# Altium PCB FlightEstimator.PcbDoc (part 2 of 2)
Units mm, origin at the board's own origin, x right, y up, seen from the top; angles counter-clockwise.
Board outline 49.66 x 49.66 mm, 6 copper layers (Top Layer, GND1, Middle, GND2, GND3, Bottom Layer), stack 1.959 mm thick; 78 components, 52 nets, 392 pads, 336 vias.
Unrouted connection lines stored in the file: 154.
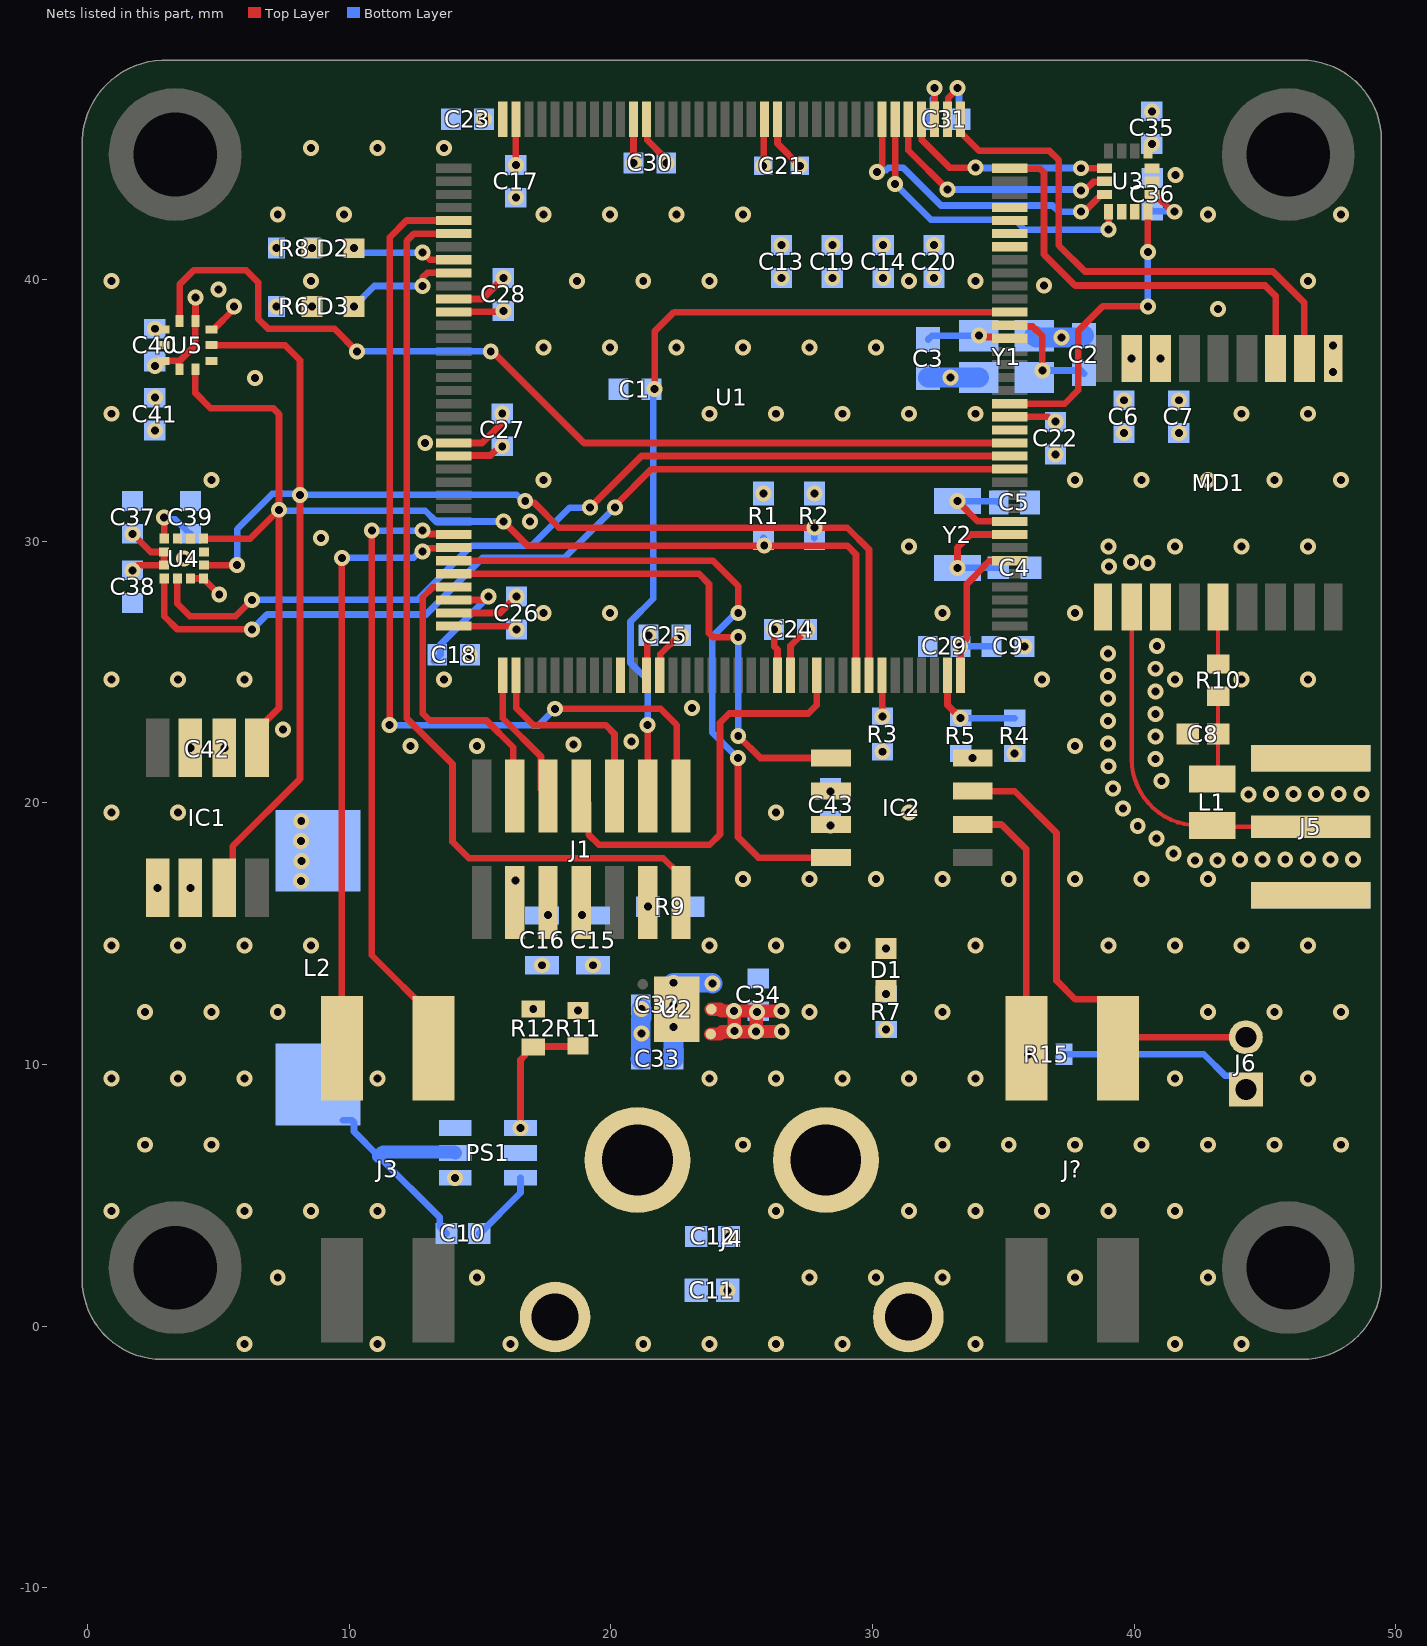
[diagram p6: the nets of this part, all layers, seen from the top]

## Part data (continued)
R15: library part CMP-03412-039700-1, "Anti-Sulfurated Chip Resistors Automotive Grade 120Ω 1% 100ppm/°C 0603 AF0603FR-07120RL", Case/Package=0603, Max Operating Temperature=155°C, Max Power Dissipation=100mW, Min Operating Temperature=-55°C, Resistance=120R, Resistor Type="Thick Film", Temperature Coefficient=100ppm/°C, Tolerance=1%, Features="Moisture Resistant", Height=0.022inch, Length=0.063inch, Number of Terminations=2, Packaging="Tape and Reel", RoHS Compliant=Yes, Series=AF, Width=0.031inch
U1: library part CMP-12105-000009-1, "LQFP 144 20X20X1.4 2", Ambient Temperature Range High=+85°C, Ambient Temperature Range Low=-40°C, Frequency=480MHz, Manufacturer=STMicroelectronics, Max Junction Temp=+125°C, Max Supply Voltage=3.6V, Min Supply Voltage=1.62V, Package=LQFP144-1A, Temperature="-40°C to +125°C", Automotive=No, Category=IC, ComponentLink2Description=Datasheet, ComponentLink2URL=https://www.st.com/resource/en/datasheet/stm32h753zi.pdf, Core Architecture="ARM Cortex-M7", Data Bus Width=32bits, Device Class L1="Integrated Circuits (ICs)", Device Class L2="Embedded Processors and Controllers", Device Class L3=Microcontrollers, Digikey Description="LQFP 144 20X20X1.4 2", Height=1.6mm, Interface=I2C,SPI,UART,USART,CAN,USB,LIN,IrDA,Ethernet,I2S,SMBus,Other, Lead Free=Yes, Manufacturer Part Number=STM32H753ZIT6, Memory Size=2MBytes, Memory Type=FLASH, Mouser Description="MCU 32-Bit STM32 ARM Cortex M7 RISC 2MB Flash 1.8V/2.5V/3.3V 144-Pin LQFP Tray", Number Of A/D Converters=3, Number Of Adc Channels=36, Number Of Cores=1, Number Of Ethernet Channels=1, Number Of I2C Channels=4, Number Of I/Os=114, Number Of Pwm Channels=24, Number Of Spi Channels=6, Number Of Timers/Counters=20, Number Of Uart Channels=9, Number Of Usb Channels=2, Octopart=https://octopart.com/stm32h753zit6-stmicroelectronics-87879771, Ram Size=1MBytes, RoHS=TRUE, Standoff Height=0.05mm, Temperature Range High=+125°C, Temperature Range Low=-40°C
U2: library part CMP-12153-000011-1, "IC REG LINEAR 3.3V 2A 6DFN", Case/Package=DFN, Dropout Voltage=130mV, Max Input Voltage=6V, Max Operating Temperature=125°C, Min Input Voltage=1.25V, Min Operating Temperature=-40°C, Operating Supply Current=1mA, Output Current=2A, Output Voltage=3.3V, Package Quantity=3000, Lead Free="Lead Free", Mount="Surface Mount", Number of Outputs=1, Number of Regulators=1, Output Type=Fixed, Packaging="Tape and Reel"
U3: library part CMP-12177-000015-1, "INEMO INERTIAL MODULE: 3D ACCELE"
U4: library part CMP-2000-07463-2, "SENSOR MR I2C/SPI 12LGA", Manufacturer=STMicroelectronics, Manufacturer Part Number=LIS3MDLTR, Max Supply Voltage=3.6V, Min Supply Voltage=1.71V, Operating Supply Current=40-270uA, Package=VFLGA-12-8365767, Temperature="-40°C to +85°C", Temperature Range High=+85°C, Temperature Range Low=-40°C, Automotive=No, Category=IC, ComponentLink2Description=Datasheet, ComponentLink2URL=https://www.st.com/resource/en/datasheet/lis3mdl.pdf, Device Class L1=Sensors, Device Class L2="Magnetic Sensors", Device Class L3=unset, Digikey Description="SENSOR MR I2C/SPI 12LGA", Footprint Url=https://www.st.com/content/ccc/resource/technical/document/technical_note/73/17/9c/16/dd/96/4a/01/CD00134799.pdf/files/CD00134799.pdf/jcr:content/translations/en.CD00134799.pdf, Height=1mm, Lead Free=Yes, Mouser Description="Board Mount Hall Effect / Magnetic Sensors Ultra Lo-Pwr Hi Perf 3-Axis 1.9-3.6V", Octopart=https://octopart.com/lis3mdltr-stmicroelectronics-29403125, RoHS=TRUE, Sensing Method=Magnetic, Sensor Output=I2C,SPI
U5: library part CMP-2000-06573-1, "MEMS Pressure Sensor: 260 - 1260 hPa Absolute Digital Output Barometer, 1.7 to 3.6 V, -30 to 105 degC, 10-Pin LGA, RoHS, Tape and Reel", Manufacturer=STMicroelectronics, Operating Pressure=3.77PSI~18.27PSI(26kPa~126kPa), Operating Temperature=-30°C~105°C, Package / Case=10-VFLGA, Package Description="10-Pin Holed Land Grid Array, Body 2.5 x 2.5 mm, Pitch 0.6 mm", Package Reference=LGA-10, PartNumber=LPS25HB, Supplier Device Package=10-LLGA(2.5x2.5), Voltage - Supply=1.7V~3.6V, Accuracy=±0.003PSI(±0.02kPa), Category=Sensors,Transducers, Datasheet URL=http://www.st.com/st-web-ui/static/active/en/resource/technical/document/datasheet/DM00141379.pdf, Datasheet Version="Rev. 2, 05/2015", Family=PressureSensors,Transducers, Features=TemperatureCompensated, Manufacturer URL=http://www.st.com/, Maximum Pressure=290.08PSI(2000kPa), Mounting Technology=SurfaceMount, Output=24b, Output Type=I²C,SPI, Package URL=http://www.st.com/st-web-ui/static/active/en/resource/technical/document/datasheet/DM00141379.pdf, Port Size=-, Port Style=NoPort, Pressure Type=Absolute, Series=-, Termination Style=SolderPad
Y1: "Crystal or Oscillator", Manufacturer_Name="Diodes Incorporated", Mouser Part Number=729-FL0800008Q, Datasheet Link=https://www.mouser.com/datasheet/2/115/L0800008Q-1536355.pdf, Height=0.78mm, Manufacturer_Part_Number=FL0800008Q, Mouser Price/Stock=https://www.mouser.co.uk/ProductDetail/Diodes-Incorporated/FL0800008Q?qs=gZXFycFWdAO7SZw%2FmZY3pg%3D%3D
Y2: library part CMP-27762-015953-1, "Crystal 32.768kHz ±20ppm (Tol) 6pF FUND 70kΩ Automotive 2-Pin Mini-CSMD T/R", Case/Package=SMD/SMT, ESR (Equivalent Series Resistance)=70kR, Frequency=32.768kHz, Frequency Tolerance=20ppm, Load Capacitance=6pF, Max Operating Temperature=85°C, Min Operating Temperature=-40°C, Ratings=AEC-Q200, Height=0.035inch, Length=0.126inch, Mount="Surface Mount", Packaging="Cut Tape", RoHS Compliant=Yes, Series=ABS07AIG, Width=0.059inch

## Free pads (board coordinates)
  round 5.08 hole 3.2: 2(3.343,2.237) 2(3.343,44.782) 2(45.888,2.237) 2(45.888,44.782)

## Via types
v1: diameter 0.61, hole 0.305, Top Layer to Bottom Layer, tented both sides, 336 vias

## Nets (pads, with @x,y where several pads share a name; then routed paths per layer and width w, separated by ;. In a path a pad name is that pad's centre, name@x,y a point inside that pad or via, vN(x,y) a via of type N, cw(c..) or ccw(c..) an arc to the next point about the centre after c; other vN are vias at no path point)
3V3: C6.2 C7.2 C9.1 C13.1 C14.1 C19.1 C20.1 C21.2 C22.1 C23.1 C24.1 C25.1 C26.1 C27.1 C28.1 C29.1 C30.1 C31.1 C34.1 C35.1 C36.1 C37.1 C38.1 C40.2 C41.2 C42.1 C43.1 D1.2 IC1.3 IC1.5 IC1.6 IC2.3 J1.3 MD1.7 MD1.8 R1.1 R2.1 R4.1 U1.6 U1.17 U1.30 U1.32 U1.33 U1.39 U1.52 U1.62 U1.72 U1.84 U1.95 U1.108 U1.121 U1.131 U1.144 U2.1 U2.2 U3.5 U3.8 U4.5 U4.6 U4.9 U4.10 U5.1 U5.5 U5.6 U5.10 | length 43.5
  Top Layer w0.254: v1(1.714,28.889) 1.913,29.088 U4.6@2.916,29.088 U4.5@2.916,29.587 2.413,29.587 v1(1.714,30.286) ; U5.10@2.895,36.896 3.515,36.896 4.115,37.496 U5.6@4.115,38.416 4.12,38.421 4.12,39.314 v1(4.124,39.319) ; U4.9@3.929,28.575 4.417,28.575 v1(5.029,27.962) v1@5.054,27.962 ; U5.5@4.735,38.096 4.81,38.096 5.601,38.887 v1(5.601,38.965) ; U1.108@13.99,26.758 16.162,26.758 16.325,26.596 v1@16.421,26.596 ; U1.95@13.99,33.258 14.011,33.278 15.397,33.278 15.749,33.631 v1(15.846,33.631) ; U1.84@13.99,38.758 14.011,38.778 15.859,38.778 v1(15.888,38.807) ; v1(20.861,44.463) 20.863,44.465 20.863,46.131 U1.62@20.865,46.133 ; U1.121@21.865,24.883 21.886,24.903 21.886,25.684 22.605,26.403 v1(22.687,26.403) ; v1(24.709,12.054) v1@24.715,12.048 ; v1@24.715,11.291 v1(24.721,11.285) ; v1(25.818,44.348) 25.845,44.376 25.845,46.113 U1.52@25.865,46.133 ; U1.131@26.865,24.883 26.865,26.005 v1(27.492,26.632) ; U1.39@32.365,46.133 v1(32.365,47.32) ; U1.144@33.365,24.883 33.365,26.05 33.604,26.289 33.604,28.369 34.261,29.026 34.261,29.059 34.439,29.238 35.22,29.238 U1.6@35.24,29.258 ; U1.17@35.24,34.758 36.706,34.758 36.893,34.571 v1(36.99,34.571) ; U3.8@40.523,44.92 40.523,45.027 v1(40.68,45.185) ; U3.5@40.685,43.258 40.798,43.258 41.46,42.595 v1@41.573,42.595
  Top Layer w0.508: U2.1@23.817,11.166 24.167,11.166 24.25,11.249 v1@25.543,11.249 ; U2.2@23.839,12.116 24.167,12.116 24.233,12.05 v1@25.559,12.05 ; v1@24.715,11.291 v1@24.715,12.048 ; v1@26.522,11.271 v1(26.528,11.265) v1(25.543,11.265) 25.559,11.281 25.559,11.991 v1(25.576,12.007) 25.603,12.007 25.646,12.05 v1(26.516,12.05) v1@26.522,12.044
  Bottom Layer w0.254: C31.1@32.111,46.133 32.302,46.324 32.302,46.92 32.365,46.983 v1(32.365,47.32) ; v1(33.35,25.981) C9.1@34.55,25.981 ; C36.1@40.685,42.631 40.703,42.613 41.517,42.613 v1(41.535,42.595)
  other v1: 30.518,14.43 2.672,16.756 3.922,16.756 16.345,17.031 28.393,19.138 35.433,21.885 3.922,22.106 16.386,26.631 25.832,31.825 27.775,31.825 39.605,35.39 41.705,35.39 2.565,35.488 2.565,36.696 39.905,36.983 41.005,36.983 26.518,41.318 28.461,41.318 30.404,41.318 32.348,41.318 15.142,46.133
24V0: C11.1 C12.1 J4.2 PS1.3 PS1.5
BOOT0: R3.2 U1.138 | length 1.6
  Top Layer w0.254: U1.138@30.365,24.883 30.374,24.874 30.374,23.317 v1(30.383,23.308)
CANH: IC2.7 J6.2 J?.4 | length 18.4
  Top Layer w0.254: IC2.7@33.827,20.447 35.433,20.447 37.029,18.851 37.029,13.208 37.742,12.494 38.706,12.494 39.379,11.821 J?.4@39.379,10.621 39.8,11.042 J6.2@44.006,11.042
CANL: IC2.6 J?.2 R15.2 | length 10
  Top Layer w0.254: IC2.6@33.827,19.177 34.924,19.177 35.879,18.223 J?.2@35.879,10.621
  other v1: 35.964,10.392
DCREG5V0: C15.1 C16.1 C32.1 C33.1 L2.2 R11.2 U2.5 U2.6 | length 1.9
  Bottom Layer w0.762: C33.1@21.137,10.214 21.139,10.216 21.139,11.763 21.16,11.784 v1(21.16,12.12)
  other v1: 21.16,11.184 18.745,12.068 17.367,13.795 19.317,13.795 8.158,17.013 8.166,17.785 8.158,18.543 8.163,19.317
FDCAN1_RX: IC2.4 U1.103 | length 25.6
  Top Layer w0.254: U1.103@13.99,29.258 13.993,29.261 23.889,29.261 24.865,28.284 v1(24.865,27.253) ; v1(24.857,21.708) 24.857,18.691 25.641,17.907 IC2.4@28.403,17.907
  Bottom Layer w0.254: v1(24.857,21.708) 23.865,22.7 23.865,26.335 24.784,27.253 v1(24.865,27.253)
FDCAN1_TX: IC2.1 U1.104 | length 20.6
  Top Layer w0.254: U1.104@13.99,28.758 21.26,28.758 23.363,28.758 23.748,28.372 23.748,26.485 23.898,26.335 v1(24.865,26.335) ; v1(24.865,22.562) 25.71,21.717 IC2.1@28.403,21.717
  Bottom Layer w0.254: v1(24.865,22.562) v1(24.865,26.335)
GND: C1.2 C2.2 C3.2 C4.2 C5.2 C6.1 C7.1 C8.2 C9.2 C11.2 C12.2 C13.2 C14.2 C15.2 C16.2 C17.2 C18.2 C19.2 C20.2 C21.1 C22.2 C23.2 C24.2 C25.2 C26.2 C27.2 C28.2 C29.2 C30.2 C31.2 C32.2 C33.2 C34.2 C35.2 C36.2 C37.2 C38.2 C39.1 C40.1 C41.1 C42.2 C43.2 IC1.2 IC2.2 IC2.8 J1.5 J1.7 J4.1 J4.3 J4.4 J5.2 J5.3 J5.4 J5.5 MD1.1 MD1.10 MD1.12 PS1.1 R3.1 R5.1 R6.1 R7.1 R8.1 R9.1 R12.1 U1.16 U1.31 U1.38 U1.51 U1.61 U1.83 U1.94 U1.107 U1.120 U1.130 U2.3 U2.7 U3.2 U3.3 U3.6 U3.7 U4.2 U4.3 U4.12 U5.3 U5.8 U5.9 Y1.2 Y1.4 | length 23.9
  Top Layer w0.254: U1.107@13.99,27.258 15.759,27.258 v1@16.442,27.941 ; U1.94@13.99,33.758 15.071,33.758 15.888,34.574 ; U1.83@13.99,39.258 15.085,39.258 v1(15.888,40.06) ; U1.120@21.365,24.883 21.386,24.903 21.386,26.356 v1(21.433,26.403) ; U1.61@21.365,46.133 21.386,46.113 21.386,45.332 22.047,44.67 22.047,44.531 v1(22.115,44.463) ; v1(26.238,26.632) 26.238,25.985 26.365,25.858 U1.130@26.365,24.883 ; U1.51@26.365,46.133 26.365,45.201 v1(27.218,44.348) ; U1.38@32.865,46.133 32.886,46.153 32.886,46.934 33.238,47.287 v1(33.238,47.32)
  Bottom Layer w0.254: v1(33.238,47.32) 33.302,47.257 33.302,46.196 C31.2@33.365,46.133
  Bottom Layer w0.762: C33.2@22.391,10.214 v1(22.391,11.426) ; v1(22.391,13.126) 23.855,13.126 v1(23.887,13.095) ; C3.2@32.121,36.258 Y1.4@34.061,36.258 ; Y1.2@36.181,37.858 36.257,37.783 38.005,37.783 38.005,37.785 C2.2@38.08,37.86
  other v1: 5.994,-0.686 11.074,-0.686 16.154,-0.686 21.234,-0.686 23.774,-0.686 26.314,-0.686 28.854,-0.686 33.934,-0.686 41.554,-0.686 44.094,-0.686 24.46,1.372 7.264,1.854 14.884,1.854 27.584,1.854 30.124,1.854 32.664,1.854 37.744,1.854 42.824,1.854 24.51,3.429 0.914,4.394 5.994,4.394 8.534,4.394 11.074,4.394 26.314,4.394 31.394,4.394 33.934,4.394 36.474,4.394 39.014,4.394 41.554,4.394 14.045,5.671 2.184,6.934 4.724,6.934 25.044,6.934 32.664,6.934 35.204,6.934 37.744,6.934 40.284,6.934 42.824,6.934 45.364,6.934 47.904,6.934 0.914,9.474 3.454,9.474 5.994,9.474 11.074,9.474 23.774,9.474 26.314,9.474 28.854,9.474 31.394,9.474 33.934,9.474 41.554,9.474 46.634,9.474 30.518,11.343 2.184,12.014 4.724,12.014 7.264,12.014 27.584,12.014 32.664,12.014 42.824,12.014 45.364,12.014 47.904,12.014 17.031,12.116 22.391,12.276 0.914,14.554 3.454,14.554 5.994,14.554 8.534,14.554 23.774,14.554 26.314,14.554 28.854,14.554 33.934,14.554 39.014,14.554 41.554,14.554 44.094,14.554 46.634,14.554 17.593,15.718 18.897,15.711 25.044,17.094 27.584,17.094 30.124,17.094 32.664,17.094 35.204,17.094 37.744,17.094 40.284,17.094 42.824,17.094 42.319,17.807 43.182,17.807 44.046,17.831 44.909,17.843 45.773,17.843 46.636,17.843 47.5,17.843 48.364,17.843 41.494,18.064 40.845,18.634 40.135,19.125 0.914,19.634 3.454,19.634 26.314,19.634 31.394,19.634 39.571,19.779 44.363,20.319 45.226,20.333 46.09,20.333 46.954,20.333 47.817,20.333 48.681,20.333 28.393,20.438 39.193,20.555 41.044,20.842 39.018,21.401 40.809,21.674 33.827,21.717 30.383,21.955 5.222,22.106 12.344,22.174 14.884,22.174 37.744,22.174 18.565,22.241 39.001,22.264 20.777,22.343 40.81,22.537 7.457,22.799 39.001,23.128 40.81,23.401 23.096,23.631 39.001,23.992 40.81,24.264 0.914,24.714 3.454,24.714 5.994,24.714 13.614,24.714 36.474,24.714 41.554,24.714 44.094,24.714 46.634,24.714 39.001,24.855 40.81,25.128 14.617,25.66 39.001,25.719 35.804,25.981 40.868,25.99 17.424,27.254 19.964,27.254 32.664,27.254 37.744,27.254 16.386,27.885 39.032,29.044 40.518,29.174 39.881,29.202 3.679,29.338 31.394,29.794 39.014,29.794 41.554,29.794 44.094,29.794 46.634,29.794 8.915,30.13 16.909,30.758 4.724,32.334 17.424,32.334 37.744,32.334 40.284,32.334 42.824,32.334 45.364,32.334 47.904,32.334 36.99,33.317 12.902,33.758 39.605,34.136 41.705,34.136 2.565,34.235 0.914,34.874 15.846,34.885 23.774,34.874 26.314,34.874 28.854,34.874 31.394,34.874 33.934,34.874 44.094,34.874 46.634,34.874 6.401,36.246 32.977,36.258 47.605,36.462 17.424,37.414 19.964,37.414 22.504,37.414 25.044,37.414 27.584,37.414 30.124,37.414 47.605,37.49 37.224,37.783 2.565,38.123 43.205,38.88 7.221,38.976 4.994,39.627 36.551,39.776 0.914,39.954 8.534,39.954 18.694,39.954 21.234,39.954 23.774,39.954 31.394,39.954 33.934,39.954 46.634,39.954 26.518,40.064 28.461,40.064 30.404,40.064 32.348,40.064 7.219,41.205 7.264,42.494 9.804,42.494 17.424,42.494 19.964,42.494 22.504,42.494 25.044,42.494 42.824,42.494 47.904,42.494 16.365,43.131 41.573,44.008 8.534,45.034 11.074,45.034 13.614,45.034 40.675,46.435
I2C1_SCL: IC1.1 R1.2 U1.136 U4.1 U5.2 | length 48.6
  Top Layer w0.254: U5.2@4.115,36.576 4.115,35.662 4.686,35.09 7.087,35.09 7.315,34.861 v1(7.315,31.204) ; U4.1@4.429,30.1 6.211,30.1 v1(7.315,31.204) ; IC1.1@6.472,22.106 6.472,22.781 7.315,23.624 v1(7.315,31.204) ; v1(15.888,30.758) 16.813,29.832 v1(25.859,29.832) 29.032,29.832 29.365,29.499 U1.136@29.365,24.883
  Bottom Layer w0.254: v1(7.315,31.204) 7.353,31.166 12.902,31.166 13.31,30.758 v1(15.888,30.758) ; R1.2@25.832,30.125 25.859,30.098 v1(25.859,29.832)
I2C1_SDA: IC1.7 R2.2 U1.137 U4.11 U5.4 | length 58.4
  Top Layer w0.254: U4.11@4.441,29.088 v1(5.715,29.088) ; U5.4@4.735,37.496 4.74,37.49 7.544,37.49 8.115,36.919 v1(8.115,31.775) 8.115,20.917 5.545,18.347 5.545,17.079 IC1.7@5.222,16.756 ; v1(16.725,31.544) 16.793,31.476 17.058,31.476 18.016,30.518 v1(27.775,30.518) 29.032,30.518 29.865,29.685 U1.137@29.865,24.883
  Bottom Layer w0.254: v1(5.715,29.088) 5.715,30.466 7.063,31.813 8.077,31.813 v1(8.115,31.775) 16.397,31.775 16.628,31.544 v1(16.725,31.544) ; R2.2@27.775,30.125 v1(27.775,30.518)
NetC8_1: C8.1 L1.2 R10.1 | length 3.4
  Top Layer w0.156: L1.2@42.977,20.917 ccw(c42.977,21.147) 43.207,21.147 C8.1@43.207,22.631 ; C8.1@43.097,22.631 ccw(c43.097,22.74) 43.205,22.74 R10.1@43.205,24.073
NetC10_1: C10.1 L2.1 PS1.2 | length 9.2
  Bottom Layer w0.254: L2.1@9.745,7.873 10.105,7.873 10.18,7.798 10.18,7.438 11.122,6.497 13.463,4.155 13.463,3.796 C10.1@13.716,3.543
  Bottom Layer w0.508: 11.122,6.497 11.285,6.66 14.006,6.66 PS1.2@14.045,6.621
NetC10_2: C10.2 PS1.6 | length 2.8
  Bottom Layer w0.254: C10.2@14.967,3.543 14.989,3.543 16.545,5.099 PS1.6@16.545,5.671
NetC17_1: C17.1 U1.71 | length 1.7
  Top Layer w0.254: v1(16.365,44.385) U1.71@16.365,46.133
NetC18_1: C18.1 U1.106 | length 4.7
  Top Layer w0.254: U1.106@13.99,27.758 15.092,27.758 15.219,27.885 v1(15.315,27.885)
  Bottom Layer w0.254: C18.1@13.233,25.408 13.485,25.66 13.485,26.055 v1(15.315,27.885)
NetC39_2: C39.2 U4.4 | length 2.1
  Top Layer w0.254: v1(2.916,30.913) 2.923,30.906 2.923,30.106 U4.4@2.929,30.1
  Bottom Layer w0.254: v1(2.916,30.913) 2.985,30.844 3.343,30.844 3.902,30.286 C39.2@3.929,30.286
NetD1_1: D1.1 R7.2
  other v1: 30.518,12.697
NetD2_1: D2.1 R8.2
  other v1: 8.572,41.205
NetD3_1: D3.1 R6.2
  other v1: 8.573,38.976
NetJ1_11: J1.11 R9.2
  other v1: 21.417,16.032
NetJ6_1: J6.1 R15.1 | length 7.4
  Bottom Layer w0.254: R15.1@37.317,10.392 42.656,10.392 43.483,9.565 43.744,9.565 44.007,9.301 J6.1@44.007,9.041
NetPS1_4: PS1.4 R11.1 R12.2 | length 5.1
  Top Layer w0.254: v1(16.545,7.571) 16.545,10.18 16.708,10.343 16.708,10.468 16.906,10.666 R12.2@17.031,10.666 17.055,10.69 18.721,10.69 R11.1@18.745,10.714
NetR4_2: R4.2 R5.2 U1.143 | length 3.9
  Top Layer w0.254: U1.143@32.865,24.883 32.865,23.739 v1(33.365,23.239)
  Bottom Layer w0.254: v1(33.365,23.239) R4.2@35.433,23.239
PD4: U1.118
PD11: D2.2 U1.80 | length 4
  Top Layer w0.254: v1(12.802,41.034) 13.078,40.758 U1.80@13.99,40.758
  Bottom Layer w0.254: v1(10.173,41.205) 10.269,41.205 10.44,41.034 v1(12.802,41.034)
PD12: D3.2 U1.81 | length 4.5
  Top Layer w0.254: v1(12.802,39.758) 12.802,40.083 12.977,40.258 U1.81@13.99,40.258
  Bottom Layer w0.254: v1(10.173,38.976) 10.954,39.758 v1(12.802,39.758)
PF3: U1.13 U4.7 | length 36.5
  Top Layer w0.254: U4.7@2.929,28.575 2.929,27.132 3.429,26.632 v1(6.286,26.632) ; v1(20.148,31.287) 20.148,31.349 21.556,32.758 U1.13@35.24,32.758
  Bottom Layer w0.254: v1(6.286,26.632) 6.858,27.203 12.936,27.203 15.108,29.375 18.236,29.375 v1(20.148,31.287)
PF4: U1.14 U4.8 | length 35.5
  Top Layer w0.254: U4.8@3.429,28.575 3.429,27.611 3.908,27.132 5.656,27.132 v1(6.286,27.762) ; v1(19.202,31.287) 21.173,33.258 U1.14@35.24,33.258
  Bottom Layer w0.254: v1(6.286,27.762) 12.606,27.762 14.676,29.832 16.973,29.832 18.428,31.287 v1(19.202,31.287)
PF5: U1.15 U5.7 | length 37
  Top Layer w0.254: U5.7@3.515,38.416 3.515,39.819 4.051,40.355 6.058,40.355 6.515,39.898 6.515,38.503 6.892,38.126 9.423,38.126 v1(10.291,37.258) ; v1@15.338,37.258 15.474,37.258 18.974,33.758 U1.15@35.24,33.758
  Bottom Layer w0.254: v1(10.291,37.258) v1(15.406,37.258)
PF6: U1.18 U3.4 | length 11.8
  Top Layer w0.254: U1.18@35.24,35.258 37.344,35.258 37.855,35.769 37.855,38.041 38.791,38.976 v1(40.523,38.976) ; v1(40.523,41.059) U3.4@40.523,42.595
  Bottom Layer w0.254: v1(40.523,38.976) v1(40.523,41.059)
RF_IN: J5.1 L1.1 MD1.11 | length 14.1
  Top Layer w0.156: MD1.11@39.905,27.483 39.905,21.677 ccw(c42.445,21.677) 42.445,19.137 L1.1@42.977,19.137 ccw(c43.026,19.137) 43.026,19.088 J5.1@46.749,19.088
SPI1_CS: U1.40 U3.12 | length 8.2
  Top Layer w0.254: U1.40@31.865,46.133 31.886,46.113 31.886,45.332 32.938,44.279 v1(33.926,44.279) ; v1(37.973,44.258) U3.12@38.86,44.258
  Bottom Layer w0.254: v1(33.926,44.279) 33.937,44.269 37.962,44.269 v1(37.973,44.258)
SPI1_MISO: U1.42 U3.1 | length 12
  Top Layer w0.254: v1(30.861,43.663) 30.863,43.665 30.863,46.131 U1.42@30.865,46.133 ; v1(39.023,41.917) U3.1@39.023,42.595
  Bottom Layer w0.254: v1(30.861,43.663) 32.235,42.289 35.436,42.289 35.817,41.908 39.013,41.908 v1(39.023,41.917)
SPI1_MOSI: U1.43 U3.14 | length 11.8
  Top Layer w0.254: v1(30.175,44.12) 30.175,44.216 30.365,44.406 U1.43@30.365,46.133 ; v1(37.973,42.595) 38.041,42.663 38.153,42.663 38.748,43.258 U3.14@38.86,43.258
  Bottom Layer w0.254: v1(30.175,44.12) 30.243,44.188 30.524,44.188 30.608,44.272 31.175,44.272 32.613,42.835 36.879,42.835 37.118,42.595 v1(37.973,42.595)
SPI1_SCK: U1.41 U3.13 | length 9.5
  Top Layer w0.254: U1.41@31.365,46.133 31.365,44.944 v1(32.865,43.444) ; v1(37.973,43.41) 38.041,43.478 38.187,43.478 38.446,43.738 38.84,43.738 U3.13@38.86,43.758
  Bottom Layer w0.254: v1(32.865,43.444) 37.938,43.444 v1(37.973,43.41)
T_JTDI: J1.10 U1.110 | length 7.8
  Top Layer w0.254: U1.110@16.365,24.883 16.386,24.863 16.386,23.617 17.028,22.974 19.8,22.974 20.135,22.639 J1.10@20.135,20.258
T_NRST: C1.1 J1.12 U1.25 | length 32.3
  Top Layer w0.254: J1.12@21.405,20.258 v1(21.405,22.974) ; v1(21.671,35.814) 21.671,38.016 22.413,38.758 U1.25@35.24,38.758
  Bottom Layer w0.254: v1(21.405,22.974) 21.405,24.69 20.749,25.347 20.749,26.936 21.618,27.805 21.618,35.761 v1(21.671,35.814)
T_SWCLK: J1.6 U1.109 | length 5.3
  Top Layer w0.254: U1.109@15.865,24.883 15.865,23.238 17.327,21.776 17.327,20.526 J1.6@17.595,20.258
T_SWDIO: J1.4 U1.105 | length 11.7
  Top Layer w0.254: U1.105@13.99,28.258 13.97,28.238 13.18,28.238 12.805,27.863 12.805,23.418 13.075,23.148 15.245,23.148 16.265,22.127 16.265,20.318 J1.4@16.325,20.258
T_SWO: J1.8 U1.133 | length 16.3
  Top Layer w0.254: J1.8@18.865,20.258 19.147,19.976 19.147,18.798 19.542,18.402 23.774,18.402 24.168,18.796 24.168,23.062 24.523,23.418 27.543,23.418 27.865,23.74 U1.133@27.865,24.883
T_VCP_RX: J1.13 U1.78 | length 35.9
  Top Layer w0.254: U1.78@13.99,41.758 12.477,41.758 12.192,41.473 12.192,23.241 13.945,21.488 13.945,18.517 14.574,17.887 22.001,17.887 22.571,17.317 22.571,17.213 22.571,16.292 J1.13@22.675,16.188
T_VCP_TX: J1.14 U1.77 | length 35.6
  Top Layer w0.254: v1(11.544,22.974) 11.544,41.61 12.192,42.258 U1.77@13.99,42.258 ; v1(17.865,23.598) 21.893,23.598 22.517,22.974 22.517,20.416 J1.14@22.675,20.258
  Bottom Layer w0.254: v1(11.544,22.974) 17.242,22.974 v1(17.865,23.598)
UART1_RX: J3.2 U1.102 | length 23.2
  Top Layer w0.254: J3.2@9.715,10.621 v1(9.716,29.367) ; v1(12.802,29.616) 12.898,29.616 13.019,29.738 13.97,29.738 U1.102@13.99,29.758
  Bottom Layer w0.254: v1(9.716,29.367) 12.456,29.367 12.705,29.616 v1(12.802,29.616)
UART1_TX: J3.4 U1.101 | length 24
  Top Layer w0.254: v1(10.858,30.404) 10.858,14.178 13.215,11.821 J3.4@13.215,10.621 ; v1(12.802,30.404) 12.898,30.404 13.024,30.278 13.97,30.278 U1.101@13.99,30.258
  Bottom Layer w0.254: v1(10.858,30.404) v1(12.802,30.404)
UART2_RX: MD1.2 U1.37 | length 20.4
  Top Layer w0.254: U1.37@33.365,46.133 33.365,45.633 34.078,44.92 36.767,44.92 37.118,44.568 37.118,41.308 38.116,40.31 45.301,40.31 46.505,39.105 MD1.2@46.505,36.983
UART2_TX: MD1.3 U1.36 | length 16.4
  Top Layer w0.254: U1.36@35.24,44.258 35.261,44.238 36.403,44.238 36.551,44.089 36.551,40.966 37.741,39.776 45.005,39.776 45.405,39.376 MD1.3@45.405,36.983
VCC_RF: MD1.14 R10.2 | length 2.2
  Top Layer w0.156: R10.2@43.205,25.304 MD1.14@43.205,27.483
XTAL1A: C4.1 U1.8 Y2.1 | length 4.5
  Top Layer w0.254: v1(33.249,28.983) 33.249,29.758 33.749,30.258 U1.8@35.24,30.258
  Bottom Layer w0.254: v1(33.249,28.983) C4.1@34.803,28.983
XTAL1B: C5.1 U1.9 Y2.2 | length 3.9
  Top Layer w0.254: v1(33.249,31.533) 34.016,30.766 35.232,30.766 U1.9@35.24,30.758
  Bottom Layer w0.254: v1(33.249,31.533) 34.765,31.533 C5.1@34.815,31.482
XTAL2A: C3.1 U1.23 Y1.1 | length 3.2
  Top Layer w0.254: v1(34.061,37.858) 34.113,37.806 35.192,37.806 U1.23@35.24,37.758
  Bottom Layer w0.254: C3.1@32.121,37.712 32.267,37.858 v1(34.061,37.858)
XTAL2B: C2.1 U1.24 Y1.3 | length 4.4
  Top Layer w0.254: U1.24@35.24,38.258 35.288,38.21 36.117,38.21 36.491,37.836 v1(36.491,36.526)
  Bottom Layer w0.254: v1(36.491,36.526) 37.96,36.526 C2.1@38.08,36.406
pads on no net: IC1.4 IC1.8 IC2.5 J1.1 J1.2 J1.9 J3.1 J3.3 J?.1 J?.3 MD1.4 MD1.5 MD1.6 MD1.9 MD1.13 MD1.15 MD1.16 MD1.17 MD1.18 U1.1 U1.2 U1.3 U1.4 U1.5 U1.7 U1.10 U1.11 U1.12 U1.19 U1.20 U1.21 U1.22 U1.26 U1.27 U1.28 U1.29 U1.34 U1.35 U1.44 U1.45 U1.46 U1.47 U1.48 U1.49 U1.50 U1.53 U1.54 U1.55 U1.56 U1.57 U1.58 U1.59 U1.60 U1.63 U1.64 U1.65 U1.66 U1.67 U1.68 U1.69 U1.70 U1.73 U1.74 U1.75 U1.76 U1.79 U1.82 U1.85 U1.86 U1.87 U1.88 U1.89 U1.90 U1.91 U1.92 U1.93 U1.96 U1.97 U1.98 U1.99 U1.100 U1.111 U1.112 U1.113 U1.114 U1.115 U1.116 U1.117 U1.119 U1.122 U1.123 U1.124 U1.125 U1.126 U1.127 U1.128 U1.129 U1.132 U1.134 U1.135 U1.139 U1.140 U1.141 U1.142 U2.4 U3.9 U3.10 U3.11

## Polygon pours and split planes (outlines as drawn)
GND on Top Layer "NONET_L01_P018" (solid, shelved, pour order 18): -0.209,1.778 ccw(c2.839,1.778) 2.839,-1.27 46.4,-1.27 ccw(c46.4,1.778) 49.448,1.778 49.448,45.339 ccw(c46.4,45.339) 46.4,48.387 3.093,48.387 ccw(c2.966,45.212) -0.209,45.339
3V3 on Top Layer "NONET_L01_P016" (solid, shelved, pour order 16): 16.012,45.493 16.037,45.517 16.037,47.263 14.802,47.263 14.78,47.285 14.78,45.468
3V3 on Top Layer "NONET_L01_P007" (solid, shelved, pour order 7): 35.912,43.017 35.722,43.017 27.804,43.017 26.013,43.017 26.013,41.702 26.013,40.87 33.888,40.87 34.144,41.126 35.89,41.126
3V3 on Top Layer "NONET_L01_P006" (solid, shelved, pour order 6): 2.228,37.05 2.232,37.055 3.674,37.055 3.674,35.109 3.651,35.087 2.223,35.087
GND on Top Layer "NONET_L01_P005" (solid, shelved, pour order 5): 40.421,44.41 40.421,43.606 42.062,43.606 42.062,44.41
GND on Top Layer "Top Layer-GND" (solid, shelved, pour order 4): 40.598,29.476 40.872,29.363 41.106,29.183 41.286,28.949 41.399,28.676 41.438,28.383 41.438,26.583 41.399,26.29 41.286,26.016 41.122,25.803 41.122,21.677 41.122,21.676 41.148,21.419 41.223,21.171 41.345,20.942 41.51,20.741 41.606,20.663 41.794,20.741 42.087,20.779 43.867,20.779 44.16,20.741 44.409,20.638 44.469,20.645 49.029,20.645 49.322,20.607 49.595,20.494 49.829,20.314 50.009,20.079 50.122,19.806 50.161,19.513 50.161,18.663 50.122,18.37 50.009,18.097 49.829,17.862 49.595,17.682 49.322,17.569 49.029,17.531 44.469,17.531 44.23,17.562 44.16,17.533 43.867,17.495 42.087,17.495 41.794,17.533 41.521,17.646 41.286,17.826 41.106,18.061 41.053,18.188 41.009,18.208 40.905,18.248 40.45,18.491 40.36,18.555 40.265,18.614 39.867,18.941 39.791,19.022 39.71,19.098 39.383,19.497 39.324,19.591 39.259,19.681 39.016,20.136 38.977,20.24 38.931,20.341 38.781,20.835 38.763,20.945 38.738,21.053 38.688,21.566 38.689,21.622 38.682,21.677 38.688,21.724 38.688,25.803 38.525,26.016 38.412,26.29 38.373,26.583 38.373,28.383 38.412,28.676 38.525,28.949 38.705,29.183 38.939,29.363 39.212,29.476 39.505,29.515 40.305,29.515
3V3 on Middle "NONET_L03_P017" (solid, shelved, pour order 17): -0.209,1.778 ccw(c2.839,1.778) 2.839,-1.27 46.4,-1.27 ccw(c46.4,1.778) 49.448,1.778 49.448,45.339 ccw(c46.4,45.339) 46.4,48.387 3.093,48.387 ccw(c2.966,45.212) -0.209,45.339
DCREG5V0 on Middle "NONET_L03_P011" (solid, shelved, pour order 11): 7.565,19.705 10.919,19.705 13.144,17.48 13.144,15.598 14.455,14.287 20.99,14.287 21.328,13.95 21.328,10.466 14.337,10.466 10.401,14.402 10.401,14.859 10.401,16.573 7.627,16.573 7.627,17.785
GND on Bottom Layer "NONET_L06_P019" (solid, shelved, pour order 19): -0.209,1.778 ccw(c2.839,1.778) 2.839,-1.27 46.4,-1.27 ccw(c46.4,1.778) 49.448,1.778 49.448,45.339 ccw(c46.4,45.339) 46.4,48.387 3.093,48.387 ccw(c2.966,45.212) -0.209,45.339
NetC10_1 on Bottom Layer "NONET_L06_P008" (solid, shelved, pour order 8): 14.642,6.361 14.65,6.369 14.65,6.904 11.199,6.904 10.397,7.705 10.397,8.469 7.198,8.469 7.183,8.453 7.183,6.346 14.657,6.346
24V0 on Bottom Layer "NONET_L06_P009" (solid, shelved, pour order 9): 13.468,7.247 15.02,7.247 15.98,6.287 18.059,6.287 20.574,0.472 23.317,0.472 23.317,4.458 23.317,8.687 22.517,9.487 14.973,9.487 13.487,8.001
GND on GND1 "NONET_L02_P013" (solid, shelved, pour order 13): -0.209,1.778 ccw(c2.839,1.778) 2.839,-1.27 46.4,-1.27 ccw(c46.4,1.778) 49.448,1.778 49.448,45.339 ccw(c46.4,45.339) 46.4,48.387 3.093,48.387 ccw(c2.966,45.212) -0.209,45.339
GND on GND2 "NONET_L04_P014" (solid, shelved, pour order 14): -0.209,1.778 ccw(c2.839,1.778) 2.839,-1.27 46.4,-1.27 ccw(c46.4,1.778) 49.448,1.778 49.448,45.339 ccw(c46.4,45.339) 46.4,48.387 3.093,48.387 ccw(c2.966,45.212) -0.209,45.339
GND on GND3 "NONET_L05_P015" (solid, shelved, pour order 15): -0.209,1.778 ccw(c2.839,1.778) 2.839,-1.27 46.4,-1.27 ccw(c46.4,1.778) 49.448,1.778 49.448,45.339 ccw(c46.4,45.339) 46.4,48.387 3.093,48.387 ccw(c2.966,45.212) -0.209,45.339

## Other copper
Top Layer:
  pour cut-out: 40.502,28.856 40.668,28.745 40.779,28.579 40.818,28.383 40.818,26.583 40.779,26.386 40.668,26.22 40.503,26.11 40.503,21.677 40.501,21.666 40.537,21.297 40.648,20.932 40.828,20.596 41.07,20.301 41.364,20.059 41.654,19.904 41.724,20.009 41.891,20.121 42.087,20.16 43.867,20.16 44.063,20.121 44.229,20.009 44.253,19.974 44.272,19.987 44.469,20.026 49.029,20.026 49.225,19.987 49.391,19.876 49.502,19.709 49.541,19.513 49.541,18.663 49.502,18.467 49.391,18.301 49.225,18.189 49.029,18.15 44.469,18.15 44.272,18.189 44.195,18.241 44.063,18.153 43.867,18.114 42.087,18.114 41.891,18.153 41.724,18.264 41.613,18.431 41.574,18.627 41.574,18.669 41.29,18.756 41.245,18.779 41.197,18.794 40.742,19.037 40.703,19.069 40.658,19.093 40.26,19.42 40.228,19.459 40.189,19.491 39.862,19.89 39.838,19.934 39.806,19.974 39.563,20.428 39.548,20.477 39.524,20.521 39.374,21.015 39.369,21.065 39.355,21.113 39.304,21.627 39.307,21.652 39.302,21.677 39.308,21.708 39.308,26.11 39.143,26.22 39.032,26.386 38.993,26.583 38.993,28.383 39.032,28.579 39.143,28.745 39.309,28.856 39.505,28.895 40.305,28.895

## Silkscreen, mask and mechanical layers (free items; w line width, h text height)
Top Overlay:
  text "FlightEstimator" at 10.405,36.233 h4 r270
  text "Fredrik Skavlem" at 7.967,31.293 h4 r270
Board:
  the board outline again, w0.254